# Altium PCB WX0.012.610PCB-4.2.PcbDoc (part 1 of 2)
Units mm, origin at the board's own origin, x right, y up, seen from the top; angles counter-clockwise.
Board outline 119 x 43 mm, 2 copper layers (Top Layer, Bottom Layer), stack 0.325 mm thick; 149 components, 114 nets, 503 pads, 393 vias.
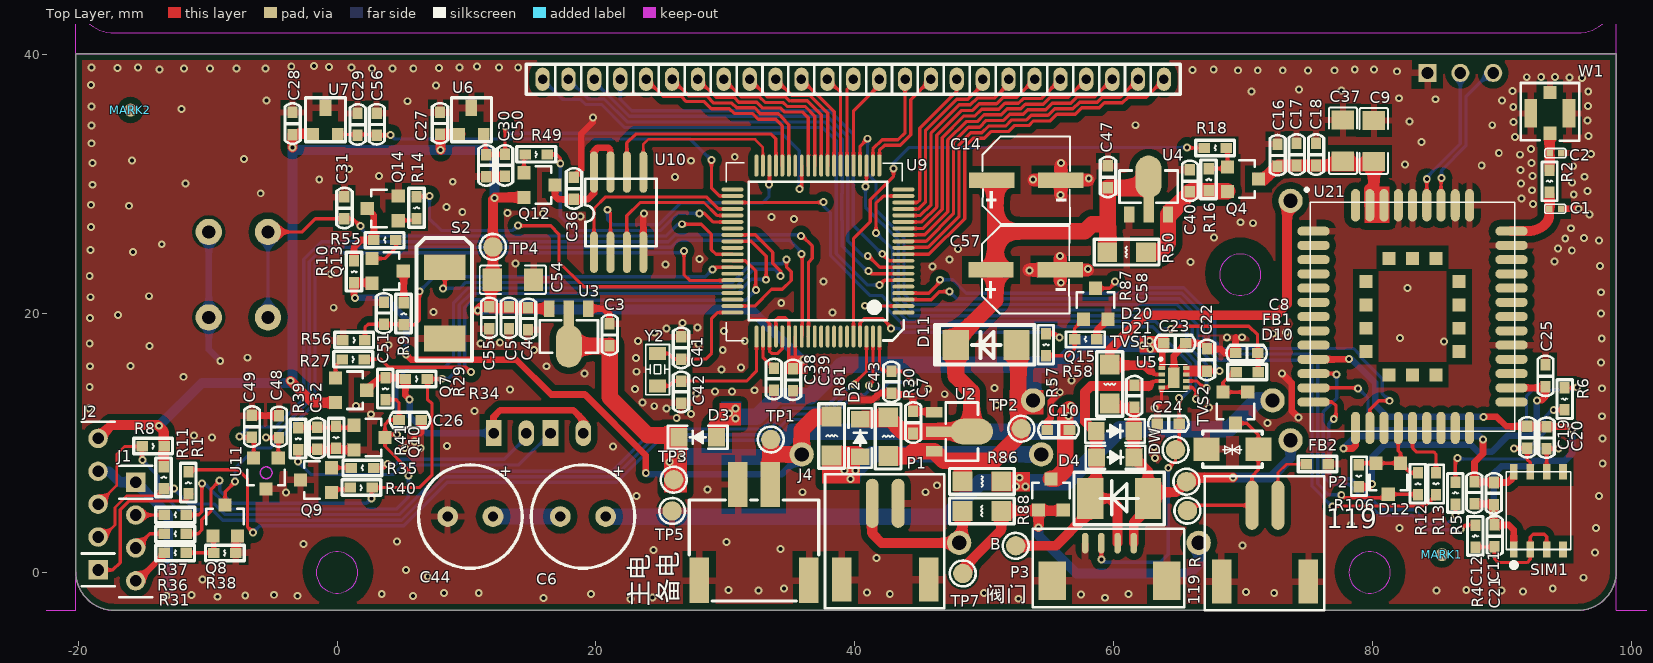
[diagram p0: Top Layer view]
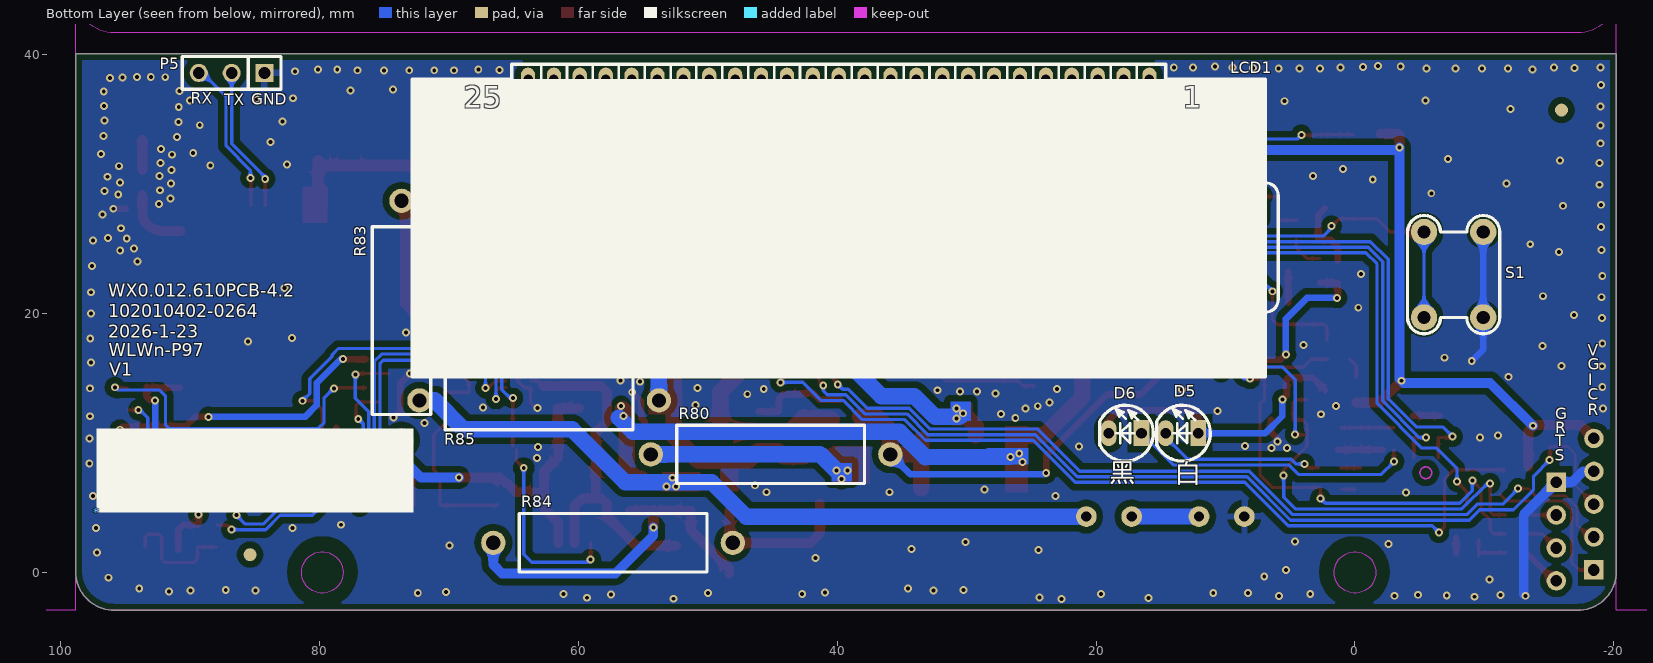
[diagram p1: Bottom Layer view, seen from below]

## Layer stack, top to bottom
Top Solder: solder mask 0.0102, Solder Resist, Dk 3.5
Top Layer: signal copper 0.0356
Dielectric 1: core 0.254, FR-4, Dk 4.2
Bottom Layer: signal copper 0.0356
Bottom Solder: solder mask 0.0102, Solder Resist, Dk 3.5

## Board outline
-20.185,0.069 ccw(c-17.185,0.069) -17.185,-2.931 95.815,-2.931 ccw(c95.815,0.069) 98.815,0.069 98.815,40.069 -20.185,40.069

## Design rules (kind name [scope] priority, off if disabled: settings)
Clearance SWS_Limit [IsComponentPad AND (AsMM(HoleSize) > 0)  AND NOT HasFootprint ('PIN254*') AND NOT HasFootprint ('金属膜电阻') AND NOT HasFootprint ('SIP-3') vs IsPAD AND (HasFootprint('*0402*') OR HasFootprint('*0603*') OR HasFootprint('*0805*') OR HasFootprint('SOT-23*')OR HasFootprint('SOT-323*'))] p1: gap=0.178 ignorepadtopadclearanceinfootprint=FALSE except(0: Arc-Hole Track-Hole SMDPad-Hole THPad-Hole Via-Hole Fill-Hole Poly-Hole Region-Hole Text-Hole; 4.5: SMDPad-THPad)
Clearance GKO_Limit_Track [IsTrack AND OnLayer('Keep-out Layer') vs IsPad AND (OnLayer('Top Layer') OR OnLayer('BOttom Layer'))AND not HasFootprint('TEST-PAD')AND not HasFootprint('DB809')AND not HasFootprint('Bridge_Pad')AND (Net<>'GND')] p2: gap=0.178 ignorepadtopadclearanceinfootprint=FALSE except(0: Arc-Hole Track-Hole SMDPad-Hole THPad-Hole Via-Hole Fill-Hole Poly-Hole Region-Hole Text-Hole; 4: Track-SMDPad)
Clearance GKO_Limit_PTH [IsPad AND  AsMM(HoleSize)>=3 vs IsPad AND (OnLayer('Top Layer') OR OnLayer('BOttom Layer'))] p3: gap=0.178 ignorepadtopadclearanceinfootprint=FALSE except(0: Arc-Hole Track-Hole SMDPad-Hole THPad-Hole Via-Hole Fill-Hole Poly-Hole Region-Hole Text-Hole; 4: SMDPad-THPad)
Clearance GKO_Limit_NPTH [IsArc AND OnLayer('Keep-out Layer') and (AsMM(ArcRadius) >=  1)   and (ArcStopAngle-ArcStartAngle= 360) vs IsPad AND (OnLayer('Top Layer') OR OnLayer('BOttom Layer'))AND not HasFootprint('TEST-PAD')AND not HasFootprint('Bridge_Pad')] p4: gap=0.178 ignorepadtopadclearanceinfootprint=FALSE except(0: Arc-Hole Track-Hole SMDPad-Hole THPad-Hole Via-Hole Fill-Hole Poly-Hole Region-Hole Text-Hole; 4: Arc-SMDPad)
Clearance ANT [InNetClass('ANT') vs InNet('GND')] p5: gap=0.508 ignorepadtopadclearanceinfootprint=FALSE except(0: Arc-Hole Track-Hole SMDPad-Hole THPad-Hole Via-Hole Fill-Hole Poly-Hole Region-Hole Text-Hole; 0.381: Arc-SMDPad Track-SMDPad SMDPad-SMDPad SMDPad-THPad SMDPad-Fill SMDPad-Poly SMDPad-Region SMDPad-Text; 0.559: Arc-Via Track-Via SMDPad-Via THPad-Via THPad-Fill THPad-Poly THPad-Region THPad-Text)
Clearance VIA-PAD-SAME [IsVia vs IsPad] p6: gap=0.381 ignorepadtopadclearanceinfootprint=FALSE except(0: Arc-Hole Track-Hole SMDPad-Via SMDPad-Hole THPad-Via THPad-Hole Via-Via Via-Hole Fill-Hole Poly-Hole Region-Hole Text-Hole)
Clearance VIA-VIA [ISVIA vs ISVIA] p7: gap=0.508 ignorepadtopadclearanceinfootprint=FALSE except(0: Arc-Hole Track-Hole SMDPad-Hole THPad-Hole Via-Hole Fill-Hole Poly-Hole Region-Hole Text-Hole)
Clearance VIA-PAD [ISVIA vs ISPAD] p8: gap=0.381 ignorepadtopadclearanceinfootprint=FALSE except(0: Arc-Hole Track-Hole SMDPad-Hole THPad-Hole Via-Hole Fill-Hole Poly-Hole Region-Hole Text-Hole)
Clearance VIA-TRACK [ISVIA vs ISTRACK] p9: gap=0.381 ignorepadtopadclearanceinfootprint=FALSE except(0: Arc-Hole Track-Hole SMDPad-Hole THPad-Hole Via-Hole Fill-Hole Poly-Hole Region-Hole Text-Hole)
Clearance Polygon [InPolygon] p10: gap=0.508 ignorepadtopadclearanceinfootprint=FALSE except(0: Arc-Hole Track-Hole SMDPad-Hole THPad-Hole Via-Hole Fill-Hole Poly-Hole Region-Hole Text-Hole)
Clearance [All] p11: gap=0.178 ignorepadtopadclearanceinfootprint=FALSE except(0: Arc-Hole Track-Hole SMDPad-Hole THPad-Hole Via-Hole Fill-Hole Poly-Hole Region-Hole Text-Hole)
ComponentClearance [All] p1 off: gap=0.254 collisioncheckmode=3 verticalgap=0.254 showdistances=FALSE
FabricationTestPointUsage TestPointUsage [All] p1: valid=0 allowmultiple=FALSE
FabricationTestpoint Testpoint [(IsPad And (OnTopLayer Or OnBottomLayer))] p1: side=3 testpointundercomponent=TRUE minsize=1.016 maxsize=2.54 preferedsize=1.524 minholesize=0 maxholesize=1.016 preferedholesize=0.813 testpointgrid=0.025 allowsidetop=TRUE allowsidebottom=TRUE usegrid=TRUE gridtolerance=0
HoleSize [All] p1 off: absolutevalues=TRUE maxlimit=7.62 minlimit=0 maxpercent=80.000 minpercent=20.000
HoleToHoleClearance [All] p1 off: gap=0.254 allowstackedmicrovias=TRUE
LayerPairs [All] p1 off: enforce=TRUE
MinimumSolderMaskSliver [All] p1 off: minsoldermaskwidth=0.254
NetAntennae [All] p1 off: netantennaetolerance=0
PlaneConnect IRM [HasFootprint ('IRM-3638J7') AND (NET = 'GND')] p1: planeconnectstyle=NoConnect reliefexpansion=0.508 reliefentries=4 reliefconductorwidth=0.254 reliefairgap=0.254
PlaneConnect "DIP_Wire-To-Board Connector" [(HasFootprint ('PH2.0-2P') or HasFootprint ('1.5-4AW')  or HasFootprint ('PH200_1*')) AND (NET = 'GND')] p2: planeconnectstyle=NoConnect reliefexpansion=0.508 reliefentries=4 reliefconductorwidth=0.254 reliefairgap=0.254
PlaneConnect DIP_KEY1 [HasFootprint ('SWT_4_600_600')] p3: planeconnectstyle=NoConnect reliefexpansion=0.508 reliefentries=4 reliefconductorwidth=0.254 reliefairgap=0.254
PlaneConnect DIP_ELECT_CAP [(HasFootprint('CAPPC_350_800_1200') OR HasFootprint('CAPPC_350_800_1600R')) and (net ='GND')] p4: planeconnectstyle=NoConnect reliefexpansion=0.508 reliefentries=4 reliefconductorwidth=0.254 reliefairgap=0.254
PlaneConnect "VIA_Direct Connect" [IsVia] p5: planeconnectstyle=Direct reliefexpansion=0.508 reliefentries=4 reliefconductorwidth=0.254 reliefairgap=0.254
PlaneConnect PIN_HEADER1 [HasFootprint ('*PIN254*')    AND (NET ='GND')] p6: planeconnectstyle=NoConnect reliefexpansion=0.508 reliefentries=4 reliefconductorwidth=0.254 reliefairgap=0.254
PlaneConnect [All] p7: planeconnectstyle=Relief reliefexpansion=0.508 reliefentries=4 reliefconductorwidth=0.508 reliefairgap=0.254
PolygonConnect DIP_KEY [HasFootprint ('SWT_4_600_600') vs InNet('GND')] p1: connectstyle=NoConnect reliefconductorwidth=0.254 reliefentries=4 polygonreliefangle="90 Angle" airgapwidth=0.254
PolygonConnect PIN_HEADER [All vs HasFootprint ('PIN254*')] p2: connectstyle=NoConnect reliefconductorwidth=0.254 reliefentries=4 polygonreliefangle="90 Angle" airgapwidth=0.508
PolygonConnect COVER_OPEN_SWITCH [HasFootprint('KEY')  Or  HasFootprint('KFT DIP-5.8X5.8') vs InNet('GND')] p3: connectstyle=NoConnect reliefconductorwidth=0.254 reliefentries=4 polygonreliefangle="90 Angle" airgapwidth=0.508
PolygonConnect SMD_ELECT_CAP [HasFootprint('CAPSM_178_660_780')  Or  HasFootprint('CAPSM_400_1000_1050') Or  HasFootprint('SMD_C 10*10.2') vs Net Like ('*GND*')] p4: connectstyle=Relief reliefconductorwidth=1.016 reliefentries=4 polygonreliefangle="90 Angle" airgapwidth=0.508
PolygonConnect [isvia] p5: connectstyle=Direct reliefconductorwidth=0.381 reliefentries=4 polygonreliefangle="90 Angle" airgapwidth=0.254
PolygonConnect PolygonConnect_1 [All] p6: connectstyle=Relief reliefconductorwidth=0.508 reliefentries=4 polygonreliefangle="90 Angle" airgapwidth=0.508
RoutingVias [All] p1: holewidth=0.254 width=0.508 viastyle="Through Hole" minholewidth=0.127 minwidth=0.127 maxholewidth=1.27 maxwidth=2.54
SilkToBoardRegionClearance [All] p1 off:
SilkToSilkClearance [All] p1 off: silktosilkclearance=0.254
SilkToSolderMaskClearance [IsPad] p1 off: minsilkscreentomaskgap=0.254 clearancetoexposedcopper=TRUE
SolderMaskExpansion [All] p1: expansion=0.102
Width [All] p1: maxlimit=7.62 minlimit=0.203 preferedwidth=0.203
18 further rules are at their usual default settings.

## Classes and differential pairs
component class WX0.008.959DL: C1 C2 C3 C4 C5 C6 C7 C9 C10 C11 C12 C14 C16 C17 C18 C19 C20 C21 C25 C37 C40 C44 C47 C51 C54 C55 C57 D2 D3 D4 D11 D12 J4 P1 P5 Q4 Q13 Q14 Q15 R2 R4 R5 R6 R9 R10 R12 R13 R14 R16 R18 R30 R50 R55 R56 R57 R58 R80 R81 R84 R85 R86 R88 R106 SIM1 TP1 TP2 TP3 TP4 TP5 TP7 U2 U3 U4 U21 W1
component class WX0.008.958DL: 119 * B C8 C22 C23 C24 C26 C27 C28 C29 C30 C31 C32 C36 C38 C39 C41 C42 C43 C48 C49 C50 C56 C58 D5 D6 D10 D20 D21 DW FB1 FB2 J1 J2 LCD1 MARK1 MARK2 P2 P3 Q7 Q8 Q9 Q10 Q12 R R1 R8 R11 R27 R29 R31 R34 R35 R36 R37 R38 R39 R40 R41 R49 R83 R87 S1 S2 TP25 TVS1 TVS2 U5 U6 U7 U9 U10 U11 Y2

## Components (designator, comment, footprint, x,y, rotation, side; value= is the part's Value field where it differs from the comment)
119 "TEST-PAD" TEST-PAD 65.684,4.775 r90 top
* "Bar Code1" "Bar Code1" 97.206,4.623 r180 bottom
B "TEST-PAD" TEST-PAD 52.426,2.057 r90 top
C1 "NC" CAP0402 94.088,28.092 r180 top
C2 "NC" CAP0402 94.113,32.385 r180 top
C3 "10uF/10V" CAP0603 21.057,17.526 r90 top
C4 "10uF/10V" CAP0603 14.757,20.422 r270 top
C5 "100nF/50V" CAP0603 13.284,20.498 r270 top
C6 "1F/2.75V" CAPPC_350_800_1600 19,4.319 r180 top locked
C7 "100nF/50V" CAP0603 44.501,10.744 r90 top
C8 "100nF/50V" CAP0603 71.095,16.942 r180 top
C9 "100uF/6.3V" GRM1206 80.086,33.325 r0 top
C10 "100nF/50V" CAP0603 56.566,10.998 r180 top
C11 "100nF/50V" CAP0603 89.357,6.934 r270 top
C12 "33pF/50V" CAP0603 87.859,6.985 r270 top
C14 "470UF" CAP-SMD_BD6.3-L6.6-W6.6-LS7.3-FD-H7.7 50.571,30.302 r0 top
C16 "100nF/50V" CAP0603 72.644,31.394 r90 top
C17 "33pF/50V" CAP0603 74.117,31.445 r90 top
C18 "10pF/50V" CAP0603 75.616,31.445 r90 top
C19 "33pF/50V" CAP0603 91.939,9.601 r90 top
C20 "33pF/50V" CAP0603 93.412,9.576 r90 top
C21 "33pF/50V" CAP0603 89.408,1.981 r90 top
C22 "100nF/50V" CAP0603 67.208,17.247 r270 top
C23 "100nF/50V" CAP0603 65.557,17.704 r180 top
C24 "100nF/50V" CAP0603 65.049,11.481 r180 top
C25 "1uF/16V" CAP0603 93.336,14.351 r90 top
C26 "100pF/50V" CAP0603 4.801,11.786 r0 top
C27 "1uF/16V" CAP0603 7.95,33.858 r90 top
C28 "1uF/16V" CAP0603 -3.44,33.839 r90 top
C29 "1nF/50V" CAP0603 1.588,33.768 r90 top
C30 "1nF/50V" CAP0603 11.532,32.268 r270 top
C31 "100nF/50V" CAP0603 0.559,27.318 r90 top
C32 "10pF/50V" CAP0603 -1.524,11.201 r270 top
C36 "100nF/50V" CAP0603 18.288,28.829 r90 top
C37 "100uF/16V" GRM1206 77.699,33.35 r0 top
C38 "100nF/50V" CAP0603 33.744,15.773 r270 top
C39 "100nF/50V" CAP0603 35.218,14.046 r90 top
C40 "100nF/50V" CAP0603 65.862,29.413 r90 top
C41 "12pF/50V" CAP0603 26.588,18.174 r270 top
C42 "12pF/50V" CAP0603 26.588,14.774 r270 top
C43 "33pF/50V" CAP0603 42.824,15.545 r270 top
C44 "1F/2.75V" CAPPC_350_800_1600 10.3,4.319 r180 top locked
C47 "100nF/50V" CAP0603 59.538,29.718 r90 top
C48 "1uF/16V" CAP0603 -4.491,10.42 r90 top
C49 "1nF/50V" CAP0603 -6.579,10.439 r90 top
C50 "33pF/50V" CAP0603 12.982,32.274 r270 top
C51 "10pF/50V" CAP0603 3.632,20.853 r270 top
C54 "100uF/16V" GRM1206 13.589,22.606 r270 top
C55 "22pF/50V" CAP0603 11.76,20.498 r270 top
C56 "33pF/50V" CAP0603 3.065,33.781 r90 top
C57 "JVJ16V470M6X8" CAP-SMD_BD6.3-L6.6-W6.6-LS7.3-FD-H7.7 50.521,23.368 r0 top
C58 "100nF/50V" CAP0603 61.595,14.453 r270 top
D2 "DS36W" SOD-123FL 40.411,8.865 r90 top
D3 "DS12W" SOD-123FL 29.388,10.439 r180 top
D4 "BAT54CLT1" SOT-23#1 55.143,6.02 r0 top
D5 "AT203" IR_254_532_300 13.36,10.759 r270 bottom
D6 "AT403" IR_254_532_300 17.76,10.759 r270 bottom
D10 "BAT54CLT1" SOT-23#1 69.393,12.725 r180 top
D11 "SS12" DO-214AC 50.14,17.577 r180 top
D12 "BAT54CLT1" SOT-23#1 81.204,7.239 r180 top
D20 "TC1N4728A" SOD-123FL 58.572,10.922 r0 top
D21 "TC1N4728A" SOD-123FL 58.598,8.89 r0 top
DW "TEST-PAD" TEST-PAD 64.77,9.474 r0 top
FB1 "FB03SN3000_30R" IND0603 71.145,15.469 r180 top
FB2 "FB03SN3000_30R" IND0603 76.581,8.357 r180 top
J1 "PIN254_1*4*WXHJ" PIN254_1*4*WXHJ -15.549,6.973 r270 top
J2 "PIN254_1*5*WXHJ" PIN254_1*5*WXHJ -18.455,0.194 r90 top
J4 "WAFER-254W-2A" "XH 2.54" 32.233,1.829 r0 top
LCD1 "GVH21861A-HPP" LCD_GVH21861A-HPP 15.877,38.094 r180 bottom locked
MARK1 "MARK" MARK 85.344,1.372 r90 top
MARK2 "MARK" MARK -15.951,35.712 r90 top
P1 "" SMT2-2.0 42.342,2.388 r0 top
P2 "PH200_1*2R" SMT2-2.0 71.679,2.235 r0 top
P3 "Header 4" SMT-1.25-4 59.665,2.261 r0 top
P5 "CON3" SIP-3 84.226,38.583 r0 bottom
Q4 "UT3401ZG" SOT-23#1 69.977,30.378 r270 top
Q7 "PNPS-9012" SOT-23#1 1.092,14.072 r270 top
Q8 "NPNS-9013" SOT-23#1 -8.641,4.017 r0 top
Q9 "PNPS-9012" SOT-23#1 -1.626,7.137 r90 top
Q10 "NPNS-9013" SOT-23#1 2.515,10.414 r270 top
Q12 "PNPS-9012" SOT-23#1 15.646,29.921 r270 top
Q13 "PNPS-9012" SOT-23#1 3.912,23.292 r270 top
Q14 "NPNS-9013" SOT-23#1 3.531,28.118 r90 top
Q15 "NPNS-9013" SOT-23#1 58.598,20.752 r0 top
R "TEST-PAD" TEST-PAD 65.608,7.01 r90 top
R1 "100R 5%" RES0603 -11.481,7.772 r270 top
R2 "0R 5%" RES0603 93.656,29.362 r90 top
R4 "22R 5%" RES0603 87.935,3.658 r270 top
R5 "22R 5%" RES0603 86.385,6.985 r270 top
R6 "22R 5%" RES0603 94.818,12.548 r90 top
R8 "10K 5%" RES0603 -13.36,9.754 r180 top
R9 "330K 5%" RES0603 5.156,20.828 r270 top
R10 "10K 5%" RES0603 1.321,24.079 r270 top
R11 "10K 5%" RES0603 -13.386,8.179 r270 top
R12 "1K 5%" RES0603 83.49,7.696 r270 top
R13 "1K 5%" RES0603 84.887,5.994 r90 top
R14 "3K 5%" RES0603 6.147,29.007 r270 top
R16 "2M 5%" RES0603 67.335,31.191 r270 top
R18 "200K 5%" RES0603 66.98,32.791 r0 top
R27 "3K 5%" RES0603 2.095,16.459 r180 top
R29 "20K 5%" RES0603 3.734,15.037 r270 top
R30 "0R 5%" RES1206 42.57,11.989 r270 top
R31 "3K 5%" RES0603 -13.35,1.518 r0 top
R34 "20K 5%" RES0603 6.985,14.935 r180 top
R35 "100R 5%" RES0603 1.118,8.077 r0 top
R36 "1K 5%" RES0603 -13.333,2.986 r0 top
R37 "1K 5%" RES0603 -13.333,4.45 r0 top
R38 "1K 5%" RES0603 -7.816,1.498 r180 top
R39 "20K 5%" RES0603 -2.997,11.176 r270 top
R40 "3K 5%" RES0603 2.718,6.553 r180 top
R41 "47K 5%" RES0603 -0.076,9.576 r90 top
R49 "3K 5%" RES0603 16.231,32.283 r180 top
R50 "0R 5%" RES1206 59.487,24.74 r0 top
R55 "10K 5%" RES0603 2.845,25.679 r0 top
R56 "220K 5%" RES0603 2.159,17.932 r180 top
R57 "3K 5%" RES0603 54.762,18.44 r270 top
R58 "20K 5%" RES0603 56.972,18.009 r0 top
R80 "33R 5%" 金属膜电阻 35.89,9.119 r0 bottom locked
R81 "0R 5%" RES1206 38.202,12.04 r270 top
R83 "20R 2W" 金属膜电阻 73.651,28.702 r270 bottom locked
R84 "33R 5%" 金属膜电阻 48.057,2.286 r0 bottom
R85 "10R 2W" 金属膜电阻 72.263,13.284 r180 bottom
R86 "0R 5%" RES1206 51.308,7.036 r180 top
R87 "0R 5%" RES1206 59.69,13.056 r90 top
R88 "0R 5%" RES1206 48.311,4.75 r0 top
R106 "20K 5%" RES0603 78.918,6.604 r90 top
S1 "SWT_4_600_600_430" SWT_4_600_600 -7.62,23 r270 bottom locked
S2 "SWS_2_520_300_300" SWS_2_520_300 8.331,23.571 r90 top
SIM1 "SIMIC" SIMIC 95.301,7.772 r180 top
TP1 "TEST-PAD" TEST-PAD 33.503,10.268 r0 top
TP2 "TEST-PAD" TEST-PAD 52.857,11.1 r0 top
TP3 "TEST-PAD" TEST-PAD 26.01,7.163 r0 top
TP4 "TEST-PAD" TEST-PAD 12.04,25.146 r0 top
TP5 "TEST-PAD" TEST-PAD 25.883,4.75 r180 top
TP7 "TEST-PAD" TEST-PAD 48.336,-0.076 r0 top
TVS1 "SMBJ6.0CA" DO-214AA 62.763,5.715 r180 top
TVS2 "SMAJ5.0CA" SMAJ5.0CA 69.164,9.525 r0 top
U2 "CE6232A50P" SOT-89 47.015,10.871 r270 top
U3 "CE6232A33P" SOT-89 17.907,19.482 r180 top
U4 "CE6232A36P" SOT-89 62.687,28.55 r0 top
U5 "DRV8837DSGR" S-PWSON-N8 64.643,15.037 r0 top
U6 "S-5712ACDL1" SOT-23#2 10.372,34.749 r0 top
U7 "S-5712ACDL1" SOT-23#2 -0.902,34.749 r0 top
U9 "FM33LG0x8" LQFP80 37.148,24.824 r180 top locked
U10 "P25Q80H-SUH-IR" SOP-8L-200MIL 19.851,23.927 r90 top
U11 "S-5712ACDL1" SOT-23#1 -5.489,7.647 r180 top
U21 "BC28-CNS" BC28-CNS 83.074,19.761 r0 top
W1 "ANT-IPEX" ANT-IPEX 93.682,35.433 r0 top
Y2 "32.768kD" SMD-3215_2P 24.764,14.415 r90 top

## Footprints (in the part's own frame and the unit in brackets; to place one, negate y for a bottom-side part, rotate by r counter-clockwise, add the part's x,y. Pads: shape width x height; smd on the part's side, far side on the other; paste and mask are expansions set on the pad)
ANT-IPEX [mm] "IPX天线座"
  rect 1x1.05 smd: 1(0,-1.525)
  rect 1x2.2 smd: 2(-1.475,0.025) 2(1.475,0.025)
  rect 1x1 smd: 2(0,1.626)
  silkscreen extent -2.26,-2.08 2.26,2.37, body extent -1.5,-1.55 1.5,1.55, height 1.25
"Bar Code1" [mm]
  silkscreen extent 0,0 24.5,6.5
BC28-CNS [mm] "BC28-CNS Moudle 58Pin 15.8X17.7mm H2.2mm RO"
  oval 2.5x0.7 smd mask+0.05: 1(-7.65,6.6) 2(-7.65,5.5) 3(-7.65,4.4) 4(-7.65,3.3) 5(-7.65,2.2) 6(-7.65,1.1) 7(-7.65,0) 8(-7.65,-1.1) 9(-7.65,-2.2) 10(-7.65,-3.3) 11(-7.65,-4.4) 12(-7.65,-5.5) 13(-7.65,-6.6) 23(7.65,-6.6) 24(7.65,-5.5) 25(7.65,-4.4) 26(7.65,-3.3) 27(7.65,-2.2) 28(7.65,-1.1) 29(7.65,0) 30(7.65,1.1) 31(7.65,2.2) 32(7.65,3.3) 33(7.65,4.4) 34(7.65,5.5) 35(7.65,6.6)
  oval 0.7x2.5 smd mask+0.05: 14(-4.4,-8.6) 15(-3.3,-8.6) 16(-2.2,-8.6) 17(-1.1,-8.6) 18(0,-8.6) 19(1.1,-8.6) 20(2.2,-8.6) 21(3.3,-8.6) 22(4.4,-8.6) 36(4.4,8.6) 37(3.3,8.6) 38(2.2,8.6) 39(1.1,8.6) 40(0,8.6) 41(-1.1,8.6) 42(-2.2,8.6) 43(-3.3,8.6) 44(-4.4,8.6)
  rect 1x1 smd mask+0.05: 45(-3.6,2.7) 46(-3.6,0.9) 47(-3.6,-0.9) 48(-3.6,-2.7) 49(-1.8,-4.5) 50(0,-4.5) 51(1.8,-4.5) 52(3.6,-2.7) 53(3.6,-0.9) 54(3.6,0.9) 55(3.6,2.7) 56(1.8,4.5) 57(0,4.5) 58(-1.8,4.5)
  silkscreen extent -7.9,-8.85 7.9,8.85, body extent -7.9,-8.85 7.9,8.85, height 2
CAP0402 [mm]
  rect 0.5x0.5 smd: 1(-0.457,0) 2(0.457,0)
  silkscreen extent -0.81,-0.36 0.81,0.36, body extent -0.5,-0.25 0.5,0.25, height 0.5
CAP0603 [mil]
  rect 35x31 smd: 1(-0.49,0) 2(66.51,0)
  silkscreen extent -29,-24 94,23, body extent 1,-15 72,15, height 20
CAP-SMD_BD6.3-L6.6-W6.6-LS7.3-FD-H7.7 [mm]
  rect 3.5x1.2 smd paste+0.051: 1(0,0) 2(5.34,0)
  silkscreen extent -0.71,-3.38 6.05,3.38, body extent -0.86,-3.3 6.44,3.3, height 7.7
CAPPC_350_800_1600 [mm]
  round 1.6 hole 0.8: 1(-1.75,0) 2(1.75,0)
  silkscreen extent -4,-4 4,4, body extent -4.01,-4 3.97,4, height 15.11
DO-214AA [mil]
  rect 80x125 smd: 1(5,0) 2(180,0)
  silkscreen extent -45,-80 230,80, body extent -13,-77 203,77, height 96
DO-214AC [mil]
  rect 80x90.55 smd: 1(-92.5,0) 2(92.5,0)
  silkscreen extent -146,-60 156,60, body extent -91,-53 90,53, height 94
GRM1206 [mm]
  rect 1.728x1.485 smd: 1(0,-1.593) 2(0,1.593)
  silkscreen extent -1.09,-2.56 1.09,2.56, body extent -0.8,-1.64 0.8,1.64, height 1.6
IND0603 [mil]
  rect 35x31 smd: 1(0,0) 2(67,0)
  silkscreen extent -26,-24 92,23, body extent 0,-15 71,15, height 12
IR_254_532_300 [mm]
  rect 2x1.2 hole 0.813: 1(0,1.27)
  oval 2x1.2 hole 0.813: 2(0,-1.27)
  silkscreen extent -2.16,-1.96 2.16,2.18, body extent -1.65,-1.64 1.64,1.66, height 5.51
LCD_GVH21861A-HPP [mm]
  oval 1.1x1.8 hole 0.732: 1(0,0) 2(-2,0) 3(-4,0) 4(-6,0) 5(-8,0) 6(-10,0) 7(-12,0) 8(-14,0) 9(-16,0) 10(-18,0) 11(-20,0) 12(-22,0) 13(-24,0) 14(-26,0) 15(-28,0) 16(-30,0) 17(-32,0) 18(-34,0) 19(-36,0) 20(-38,0) 21(-40,0) 22(-42,0) 23(-44,0) 24(-46,0) 25(-48,0)
  silkscreen extent -56.95,-23 9.95,1.17, body extent -57.15,-23.24 9.14,0, height 5.2
LQFP80 [mm]
  oval 1.7x0.3 smd: 1(-6.6,4.75) 2(-6.6,4.25) 3(-6.6,3.75) 4(-6.6,3.25) 5(-6.6,2.75) 6(-6.6,2.25) 7(-6.6,1.75) 8(-6.6,1.25) 9(-6.6,0.75) 10(-6.6,0.25) 11(-6.6,-0.25) 12(-6.6,-0.75) 13(-6.6,-1.25) 14(-6.6,-1.75) 15(-6.6,-2.25) 16(-6.6,-2.75) 17(-6.6,-3.25) 18(-6.6,-3.75) 19(-6.6,-4.25) 20(-6.6,-4.75) 41(6.6,-4.75) 42(6.6,-4.25) 43(6.6,-3.75) 44(6.6,-3.25) 45(6.6,-2.75) 46(6.6,-2.25) 47(6.6,-1.75) 48(6.6,-1.25) 49(6.6,-0.75) 50(6.6,-0.25) 51(6.6,0.25) 52(6.6,0.75) 53(6.6,1.25) 54(6.6,1.75) 55(6.6,2.25) 56(6.6,2.75) 57(6.6,3.25) 58(6.6,3.75) 59(6.6,4.25) 60(6.6,4.75)
  oval 0.3x1.7 smd: 21(-4.75,-6.6) 22(-4.25,-6.6) 23(-3.75,-6.6) 24(-3.25,-6.6) 25(-2.75,-6.6) 26(-2.25,-6.6) 27(-1.75,-6.6) 28(-1.25,-6.6) 29(-0.75,-6.6) 30(-0.25,-6.6) 31(0.25,-6.6) 32(0.75,-6.6) 33(1.25,-6.6) 34(1.75,-6.6) 35(2.25,-6.6) 36(2.75,-6.6) 37(3.25,-6.6) 38(3.75,-6.6) 39(4.25,-6.6) 40(4.75,-6.6) 61(4.75,6.6) 62(4.25,6.6) 63(3.75,6.6) 64(3.25,6.6) 65(2.75,6.6) 66(2.25,6.6) 67(1.75,6.6) 68(1.25,6.6) 69(0.75,6.6) 70(0.25,6.6) 71(-0.25,6.6) 72(-0.75,6.6) 73(-1.25,6.6) 74(-1.75,6.6) 75(-2.25,6.6) 76(-2.75,6.6) 77(-3.25,6.6) 78(-3.75,6.6) 79(-4.25,6.6) 80(-4.75,6.6)
  silkscreen extent -6.62,-6.81 7.1,6.91, body extent -7,-7.03 7,6.98, height 1.45
MARK [mm]
  round 1 smd: 0(0,0)
  round 1 smd far side: 1(0,0)
PIN254_1*4*WXHJ [mm] "Connector; Header; 4 Position"
  rect 1.5x1.5 hole 0.9: 1(0,0)
  round 1.5 hole 0.9: 2(2.54,0) 3(5.08,0) 4(7.62,0)
  silkscreen extent -1.27,-1.27 8.89,1.27
PIN254_1*5*WXHJ [mm]
  rect 1.5x1.5 hole 0.9: 1(0,0)
  round 1.5 hole 0.9: 2(2.54,0) 3(5.08,0) 4(7.62,0) 5(10.16,0)
  silkscreen extent -1.27,-1.27 11.43,1.27
RES0603 [mil]
  rect 35x31 smd: 1(0,0) 2(67,0)
  silkscreen extent -26,-24 92,23, body extent 0,-15 71,15, height 12
RES1206 [mil]
  rect 60x60 smd: 1(0,0) 2(118.11,0)
  silkscreen extent -39,-39 157,39, body extent -28,-29 150,29, height 20
S-PWSON-N8 [mm]
  rect 0.5x0.28 smd: 1(-0.95,0.75) 2(-0.95,0.25) 3(-0.95,-0.25) 4(-0.95,-0.75) 5(0.95,-0.75) 6(0.95,-0.25) 7(0.95,0.25) 8(0.95,0.75)
  rect 0.9x1.6 smd: 9(0,0)
  silkscreen extent -1.09,-1.05 1.04,1.52, body extent -0.98,-1 1.02,1, height 0.77
SIMIC [mm]
  rect 0.6x1.2 smd: 1(4.405,6) 2(3.135,6) 3(1.865,6) 4(0.595,6) 5(0.595,0) 6(1.865,0) 7(3.135,0) 8(4.405,0)
  silkscreen extent 0,0 5,7.28, body extent 0,0 4.95,5.97, height 0.6
SIP-3 [mil]
  rect 55x55 hole 36: 1(0,0)
  round 55 hole 36: 2(100,0) 3(200,0)
  silkscreen extent -50,-50 250,50
SMAJ5.0CA [mm]
  rect 2x1.8 smd: 1(-2,0) 2(2,0)
  silkscreen extent -2.3,-1.4 2.3,1.4
SMD-3215_2P [mm]
  rect 1x1.3 smd: 1(0,0) 2(2.5,0)
  silkscreen extent -0.69,-0.91 3.19,0.91, body extent -0.3,-0.99 2.9,0.99, height 0.7
SMT2-2.0 [mm]
  oval 1x3.8 smd: 1(1,2.95) 2(-1,2.95)
  rect 1.5x3.4 smd: 3(-3.35,-2.95) 4(3.35,-2.95)
  silkscreen extent -4.67,-5.15 4.57,5.2, body extent -3.94,-4.33 4.01,4.32, height 5.6
SMT-1.25-4 [mm]
  oval 0.5x1.6 smd: 1(-1.875,0) 2(-0.625,0) 3(0.625,0) 4(1.875,0)
  rect 2.1x3 smd: 5(-4.425,-2.9) 6(4.425,-2.9)
  silkscreen extent -5.92,-4.95 5.77,1.1
SOD-123FL [mm]
  rect 1.3x1.4 smd: 1(0.074,0) 2(2.974,0)
  silkscreen extent -0.78,-0.9 3.82,0.9, body extent -0.28,-0.82 3.32,0.82, height 0.95
SOP-8L-200MIL [mm]
  oval 3.2x0.61 smd: 1(0.8,0) 2(0.8,-1.27) 3(0.8,-2.54) 4(0.8,-3.81) 5(7,-3.81) 6(7,-2.54) 7(7,-1.27) 8(7,0)
  silkscreen extent 1.27,-4.83 6.48,0.66, body extent 0.89,-4.35 6.89,0.55, height 1.7
SOT-23#1 [mil]
  rect 40x40 smd: 1(-37.4,-47.24) 2(37.4,-47.24) 3(0,47.24)
  silkscreen extent -57,-12 57,35, body extent -57,-55 57,55, height 47
SOT-23#2 [mil]
  rect 36x36 smd: 1(-37,-35) 2(38,-35)
  rect 36x50 smd: 3(0,45)
  silkscreen extent -60,-59 62,75, body extent -44,-35 44,45, height 39
SOT-89 [mm]
  rect 0.8x1.27 smd: 1(-1.5,-0.9) 3(1.5,-0.9)
  oval 2x3.3 smd: 2(0,2)
  rect 0.8x2.54 smd: 2(0,-0.265)
  silkscreen extent -2.25,0 2.25,2.5, body extent -2.25,-1.02 2.25,2.92, height 1.4
SWS_2_520_300 [mm]
  rect 2x3.2 smd: 1(0,0) 2(-5.5,0)
  silkscreen extent -7.2,-2.08 2.25,2.2, body extent -5.32,-1.58 -0.02,1.52, height 3.05
SWT_4_600_600 [mil]
  round 80 hole 40: 1(-130,-90) 1(130,-90) 2(-130,90) 2(130,90)
  silkscreen extent -180,-140 180,140, body extent -162,-118 162,118, height 193
TEST-PAD [mm]
  round 1.5 smd: 1(0,0)
  silkscreen extent -1,-1 1,1
"XH 2.54" [mm]
  rect 1.5x3.5 smd paste+0 mask+0.05: 1(1.227,4.968) 2(-1.273,4.968) 3(4.213,-2.441) 4(-4.253,-2.441)
  silkscreen extent -5.02,-4.04 4.98,3.76, body extent -5.05,-4.15 4.95,6.35, height 6.13
金属膜电阻 [mil]
  round 74 hole 43.31: 1(0,0) 2(728.35,0)
  silkscreen extent 79,-89 650,89

## Part data
119 B DW R TP1 TP2 TP3 TP4 TP5 TP7: library part AD_WXHJ_TEST-PAD_01, "单面焊盘测试点"
*: library part "AD_WXHJ_Bar Code_02", "条形码 ,填充，无需焊接器件"
C1 C2: library part 101020103-0005
C3 C4: library part 101020103-0026, "106pF,10 V,±10%,0603,村田,GRM188R61A106KE47D"
C5 C7 C8 C10 C11 C16 C22 C23 C24 C31 C36 C38 C39 C40 C47 C58: library part 101020103-0021, "104pF,50 V,±10%,0603,国巨,CC0603KRX7R9BB104"
C6 C44: library part 1010202-0015, "1F,2.75 V,-20%~+20%,8mm*16mm,红宝石,2.7 DMC 1 M MY4 8X16"
C9: library part 101020101-0020, "100uF,6.3 V,±20%,1206,村田,GRM31CR60J107ME39L"
C12 C17 C19 C20 C21 C43 C50 C56: library part 101020103-0027, "33pF,50 V,±10%,0603,国巨,CC0603KRNPO9BN33"
C14: library part JVJ16V470M6X8, "470UF,10v"
C18 C32 C51: library part 101020103-0014, "10pF,50 V,±5%,0603,X7R,国巨,CC0603JRNPO9BN100"
C25 C27 C28 C48: library part 101020103-0003, "105pF,16 V,±10%,0603,国巨,CC0603KRX7R7BB105"
C26: library part 101020103-0010, "101pf,50 V,±5%,0603,国巨,CC0603JRNP09BN101"
C29 C30 C49: library part 101020103-0022, "102pF,50 V,±10%,0603,国巨,CC0603KRX7R9BB102"
C37: library part 101020101-0005
C41 C42: library part 101020103-0005, "12P,50 V,±5%,0603,国巨,CC0603JRNPO9BN12"
C54: library part 101020101-0005, "100u,16 V,±10%,1206,国巨,CC1206KRNPO7BN106P"
C55: library part 101020103-0009, "22pF,50 V,±5%,0603,国巨,CC0603JRNPO9BN22"
D2: library part 101040101-0048, "DS36W,SOD123-FL,3 A,42 V,60 V,浙江领晨科技有限公司,DS36W"
D3: library part 101040101-0048, "DS12W,SOD-123FL,1 A,0.55 V,20 V,领晨科技,DS12W"
D4 D10 D12: library part 101040101-0038, "BAT54CLT1，SOT23-3,SOT23-3,0.2 A,0.8 V,30 V,安森美,BAT54CLT1"
D5: library part 101040102-0010, "DIP-2,φ3,插件,红光,上海品观电子有限公司/可得,AT203"
D6: library part 101040102-0011, "DIP-2,φ3,插件,红光,上海品观电子有限公司/可得,AT403-PD-01"
D11: library part 101040101-0009, "SS12,DO-214AC,1 A,0.55 V,20 V,昶鑫,SS12"
D20 D21: library part 101040101-0005, "4148,4148,0.2 A,1 V,100 V,先科,LL4148"
FB1 FB2: library part 109010101-0003, "chilisin(奇力新),0603,30Ω ±25% @100MHz,150 V,125 ℃,PBY160808T-300Y-N,-55 ℃,不含铅,,,圆盘,30Ω ±25% @100MHz"
J1: library part AD_WXHJ_PinHeader_01, "1*4 ，Φ1.0 ，2.54mm，直脚,无需焊接器件"
J2: library part AD_WXHJ_PinHeader_02, "1*5 ，Φ1.0 ，2.54mm，直脚,无需焊接器件"
LCD1: library part 1010801-0028, "GVH21861A-HPP/GVH20913A－HPP-WG,65*23mm,针脚,段码,21,液晶,全透,60 ℃,-20 ℃,金视界/合肥精显,GVH21861A-HPP/GVH20913A－HPP-WG"
MARK1 MARK2: library part AD_WXHJ_MARK_01, "MARK点"
P1 P2: library part 1010902-0105, "2.0-2AW,直插弯座，2PIN，脚间距2mm，带防翘起,公头,单排,2.0-2AW;直插弯座，2PIN,脚间距2mm，带防翘起"
P3: "Header, 4-Pin"
P5: "Connector"
Q4: library part 101040201-0013, "UT3401ZG,P-MOS,SOT-23,UTC,UT3401ZG"
Q7 Q9 Q12 Q13: library part 101040201-0001, "9012,PNP,SOT-23,JCET;长电,S9012"
Q8 Q10 Q14 Q15: library part 101040201-0002, "9013,NPN,SOT-23,长电,S9013"
R1 R35: library part 101010103-0022, "100R,±5%,1/10W,0603,国巨,RC0603JR-07100RL"
R2: library part 101010103-0001, "国巨,±5%,0603,,155 ℃,-55 ℃,RC0603J2-070RL,无铅,200 ppm/℃,1/10W,,0R"
R4 R5 R6 R80 R83 R84 R85: library part 101010103-0009, "国巨,±5%,0603,,155 ℃,-55 ℃,RC0603JR-0722RL,无铅,200 ppm/℃,1/10W,,22欧"
R8 R10 R11 R55: library part 101010103-0003, "国巨,±5%,0603,,155 ℃,-55 ℃,RC0603JR-0710KL,无铅,200 ppm/℃,1/10W,,10K"
R9: library part 101010103-0066, "330K,±5%,1/10W,0603,国巨,RC0603JR-07330KL"
R12 R13 R56: library part 101010103-0044, "220K,±5%,1/10W,0603,国巨,RC0603JR-07220KL"
R14 R27 R31 R40 R49 R57: library part 101010103-0006, "国巨,±5%,0603,,155 ℃,-55 ℃,RC0603JR-073KL,无铅,100 ppm/℃,1/10W,,3K"
R16: library part 101010103-0025, "国巨,±5%,0603,,155 ℃,-55 ℃,RC0603JR-072ML,含铅,100 ppm/℃,1/10W,,2M"
R18: library part 101010103-0034, "200K,±5%,1/10W,0603,国巨,RC0603JR-07200KL"
R29 R34 R39 R58 R106: library part 101010103-0004, "国巨,±5%,0603,,155 ℃,-55 ℃,RC0603JR-0720KL,无铅,200 ppm/℃,1/10W,,20K"
R30 R50 R81 R86 R87 R88: library part 101010101-0013, "0Ω,±5%,1/4W,1206,国巨,RC1206JR-070RL"
R36 R37 R38: library part 101010103-0008, "1K,±5%,1/10W,0603,国巨,RC0603JR-071KL"
R41: library part 101010103-0012, "47K,±5%,1/10W,0603,国巨,RC0603JR-0747KL"
S1: library part 1011001-0027, "TS-1102,机械轻触,6*6*4.3直插,6*6*4.3直插,乐清市羽欧电子"
S2: library part 1011001-0041, "CSX-SEN-645B,垂直45°开关转换,3*5.2mm,360°任意方位倾斜检测,深圳市成晟科技有限公司"
SIM1: library part AD_XN_SIMIC_01, "SIMIC虚拟器件"
TVS1: library part 101040101-0024, "SMBJ6.0CA,DO-214AA,10.3 V,6.0 V,600 W,58.3 A,800 uA,上海君耀电子有限公司,SMBJ6.0CA"
TVS2: library part SMAJ5.0CA_C693487
U2: library part 1010503-0013, "S-1206B50-U3,S-1206B50-U3,SOT89-3,6.5 V,1.7 V,0.2 V,5 V,250mA@VIN≧VOUT(S)＋1.0 V﹐1.5 V≦VOUT(S),1 uA,精工电子"
U3: library part 1010503-0002, "S-1206B33-U3T1G,S-1206B33-U3T1G,SOT89-3,6.5 V,1.7 V,0.15 V,3.3 V,250mA@VIN≧VOUT(S)＋1.0 V﹐1.5 V≦VOUT(S),1 uA,精工电子"
U4: library part 1010503-0031, "CE6232A36P,CE6232A36P,SOT89-3,8 V,1.8 V,0.11 V,3.6 V,600mA,0.8 uA,南京芯力微电子有限公司"
U5: library part 101050101-0060, "DRV8837DSGR,S-PWSON-N8,TI,DRV8837DSGR"
U6 U7 U11: library part 1010504-0002, "S-5712ACDL1,SOT23-3,3.5 V,1.6 V,2 uA,精工电子,S-5712ACDL1"
U10: library part 101050101-0165, "P25Q80H-SUH-IR,SOP8208mil,普冉半导体（上海）股份有限公司,P25Q80H-SUH-IR"
U21: "BC28-CNS Moudle 58Pin 15.8X17.7mm H2.2mm RO"
W1: library part 1010902-0053, "IPEX，配GPRS天线转接线"
Y2: library part 1010601-0009

## Via types
v1: diameter 0.61, hole 0.305, Top Layer to Bottom Layer, tented both sides, 393 vias

## Nets (pads, with @x,y where several pads share a name; then routed paths per layer and width w, separated by ;. In a path a pad name is that pad's centre, name@x,y a point inside that pad or via, vN(x,y) a via of type N, cw(c..) or ccw(c..) an arc to the next point about the centre after c; other vN are vias at no path point)
3.3V: C4.1 C5.1 C27.1 C28.1 C39.2 C54.1 C55.1 J2.5 Q7.2 Q12.2 R8.1 R11.1 TP4.1 U3.3 U6.1 U7.1 U9.64 U9.66 U9.67 | length 119
  Top Layer w0.254: U9.64@33.898,18.224 33.898,19.508 34.075,19.685 34.633,19.685 34.898,19.42 U9.66@34.898,18.224 34.898,16.055 C39.2@35.218,15.736 ; 35.394,16.514 U9.67@35.394,18.035 ; C39.2@35.398,15.916 U9.67@35.398,18.224
  Top Layer w0.762: J2.5@-18.455,10.354 -17.43,11.379 -13.843,11.379 -13.386,10.922 R11.1@-13.386,8.179 ; v1(-3.581,14.808) -1.895,13.122 Q7.2@-0.108,13.122 ; v1(-3.44,32.828) C28.1@-3.44,33.826 ; C28.1@-3.382,33.884 U7.1@-1.948,33.884 ; v1@8.017,32.629 C27.1@8.017,33.854 ; C27.1@8.025,33.862 U6.1@9.544,33.862 ; v1(10.872,20.244) 11.138,20.51 C55.1@11.76,20.51 ; v1@12.04,28.804 TP4.1@12.04,25.146 12.04,22.606 11.889,22.455 11.889,20.382 U3.3@16.407,20.382 ; v1@12.207,28.971 Q12.2@14.446,28.971
  Bottom Layer w0.762: v1(-13.741,11.328) -10.439,14.63 v1@-3.759,14.63 ; v1@-3.44,14.949 v1(-3.44,32.828) ; v1@-3.251,32.639 v1(8.001,32.639) 11.616,32.639 12.167,32.088 v1(12.167,28.931) ; v1(10.872,20.244) 11.113,20.244 11.189,20.32 31.988,20.32 35.874,16.434 v1(36.043,16.434)
3.6V: C3.1 C10.1 D3.2 D4.3 TP3.1 U3.2 | length 51.4
  Top Layer w1.27: U3.2@17.907,17.482 21.025,17.482 C3.1@21.057,17.514 21.057,13.538 24.003,10.592 D3.2@26.388,10.592 ; D4.3@55.143,7.22 55.531,7.22 56.261,7.95 56.261,12.281 v1@56.572,12.592
  Bottom Layer w1.27: v1(26.619,8.915) 33.158,8.915 33.183,8.89 35.164,10.871 55.778,10.871 56.871,11.963
  other v1: 25.679,8.534 25.933,9.195 56.49,12.09 56.693,12.852
5V: C23.2 D3.1 D11.1 R30.2 R85.2 R86.2 TP2.1 U2.3 U5.1 | length 57.8
  Top Layer w1.27: D3.1@29.288,10.592 29.288,11.305 v1(30.277,12.294) ; R30.2@42.57,8.989 44.168,8.989 44.55,9.371 U2.3@46.115,9.371 46.876,8.611 50.698,8.611 52.857,10.77 52.629,11.125 D11.1@52.629,17.234
  Bottom Layer w1.27: v1(30.277,12.294) 30.556,12.014 32.428,12.014 34.028,13.614 36.576,13.614 38.418,15.457 38.456,15.457 39.052,16.053 55.843,16.053 56.122,16.332 56.159,16.332 57.506,17.678 v1@62.56,17.678 ; R85.2@53.763,13.284 53.763,16.011
  other v1: 30.785,11.887 30.785,12.675 62.814,17.247 62.23,17.526 62.763,17.882
119: C8.1 FB1.1 U9.43 | length 50
  Top Layer w0.254: U9.43@30.548,28.574 30.549,28.575 37.541,28.575 v1(37.592,28.626) ; v1(64.414,18.796) 64.643,19.025 70.434,19.025 71.107,18.352 C8.1@71.107,16.942 ; FB1.1@71.145,15.469 C8.1@71.145,16.903
  Bottom Layer w0.254: v1(37.592,28.626) 37.592,28.27 38.125,27.737 38.125,24.453 41.191,21.387 42.112,21.387 42.112,21.359 42.44,21.031 42.444,21.031 44.07,19.406 63.19,19.406 63.799,18.796 v1(64.414,18.796)
ADC_CTL: R14.1 U9.56 | length 30.1
  Top Layer w0.254: R14.1@5.893,29.032 v1@7.188,29.032 ; v1@14.072,26.772 16.51,26.772 17.145,26.137 17.145,23.978 19.049,22.074 U9.56@30.548,22.074
  Bottom Layer w0.254: v1(7.138,29.083) 7.138,27.33 8.052,26.416 13.589,26.416 v1(13.97,26.797)
CAP_CHK: C49.1 U9.69 U11.2 | length 66.8
  Top Layer w0.254: v1@-7.493,10.439 v1@-7.481,10.439 ; v1@-7.481,10.427 C49.1@-6.579,10.427 ; U11.2@-6.431,8.855 C49.1@-6.431,10.427 ; v1(35.839,25.984) 35.941,25.984 36.703,25.222 36.703,24.251 36.424,23.971 36.424,18.249 U9.69@36.398,18.224
  Bottom Layer w0.254: v1(-7.544,10.49) -6.803,11.231 -4.758,11.231 -2.565,13.423 -2.565,24.183 -1.196,25.552 25.579,25.552 26.112,26.086 v1@35.738,26.086
CAP_CTL: C48.1 U9.68 U11.1 | length 63.4
  Top Layer w0.254: v1@-5.489,10.408 C48.1@-4.491,10.408 ; U11.1@-4.539,8.847 C48.1@-4.539,10.388 ; v1@35.89,24.549 v1(35.89,24.587) ; U9.68@35.898,18.224 35.929,18.255 v1@35.929,24.549
  Bottom Layer w0.254: v1(-5.499,10.418) -4.96,10.418 -2.134,13.245 -2.134,24.004 -1.017,25.121 25.832,25.121 26.365,25.654 34.976,25.654 35.89,24.74 v1(35.89,24.587)
CLOSE: U5.5 U9.19 | length 41
  Top Layer w0.254: v1(41.631,26.213) 41.631,28.499 42.206,29.074 U9.19@43.748,29.074 ; U5.5@65.593,14.287 66.053,14.287 66.345,13.995 v1(66.345,13.411)
  Bottom Layer w0.254: v1(41.631,26.213) 41.662,26.213 42.926,24.949 42.926,21.16 44.249,19.837 64.522,19.837 65.634,18.726 65.634,16.994 66.345,16.282 v1(66.345,13.411)
COM0: LCD1.1 U9.6 | length 39.7
  Top Layer w0.254: v1(41.91,22.2) 42.284,22.574 U9.6@43.748,22.574
  Bottom Layer w0.254: LCD1.1@15.877,38.094 17.446,36.525 18.835,36.525 19.216,36.144 20.444,36.144 22.222,34.366 37.513,34.366 38.583,33.296 38.557,33.271 38.557,24.632 40.989,22.2 v1(41.91,22.2)
COM1: LCD1.2 U9.7 | length 37
  Top Layer w0.254: v1(41.046,23.292) 41.264,23.074 U9.7@43.748,23.074
  Bottom Layer w0.254: LCD1.2@17.877,38.094 19.395,36.576 20.623,36.576 22.401,34.798 37.691,34.798 39.014,33.475 39.014,29.269 38.989,29.244 38.989,27.178 ; 39.014,27.178 39.014,25.197 40.919,23.292 v1(41.046,23.292)
COM2: LCD1.3 U9.8 | length 34.7
  Top Layer w0.254: v1(40.996,24.435) 41.074,24.435 41.935,23.574 U9.8@43.748,23.574
  Bottom Layer w0.254: LCD1.3@19.877,38.094 19.877,37.933 22.58,35.23 37.87,35.23 39.446,33.654 39.446,25.629 40.64,24.435 v1(40.996,24.435)
COM3: LCD1.4 U9.9 | length 32.7
  Top Layer w0.254: v1(42.113,24.613) 42.113,24.607 42.647,24.074 U9.9@43.748,24.074
  Bottom Layer w0.254: LCD1.4@21.877,38.094 21.877,36.543 22.758,35.662 38.049,35.662 39.878,33.833 39.878,26.816 42.081,24.613 v1(42.113,24.613)
DW_CHEAK: C24.1 DW.1 P3.2 U9.2 | length 52
  Top Layer w0.254: v1(40.767,20.599) 40.793,20.574 U9.2@43.748,20.574 ; v1@59.039,0.949 v1(59.039,0.991) P3.2@59.039,2.261 ; v1@64.186,8.052 64.211,8.052 64.77,8.611 DW.1@64.77,9.474 ; v1(65.049,13.462) 65.062,13.45 C24.1@65.062,11.481 DW.1@65.062,9.766
  Bottom Layer w0.254: v1(40.767,20.599) 42.266,20.599 43.891,18.974 63.011,18.974 65.145,16.84 65.176,16.84 65.913,16.104 65.913,14.129 65.246,13.462 v1(65.049,13.462) ; v1(59.039,0.991) 59.242,0.787 63.602,0.787 64.206,1.392 v1(64.206,8.082)
FLASH_CLK: U9.37 U10.6 | length 16.3
  Top Layer w0.254: U10.6@22.391,30.927 22.391,33.172 23.076,33.858 33.528,33.858 33.898,33.488 U9.37@33.898,31.424
FLASH_CS: U9.44 U10.1 | length 14.8
  Top Layer w0.254: U10.1@19.851,24.727 19.851,28.112 20.745,29.007 28.525,29.007 29.458,28.074 U9.44@30.548,28.074
FLASH_CTL: R49.1 U9.46 | length 20.2
  Top Layer w0.254: R49.1@16.231,32.283 16.942,32.283 17.247,31.979 v1(17.247,31.598) ; v1(27.991,27.737) 28.372,27.737 29.035,27.074 U9.46@30.548,27.074
  Bottom Layer w0.254: v1(17.247,31.598) 17.247,27.508 18.339,26.416 25.013,26.416 26.333,27.737 v1(27.991,27.737)
FLASH_MISO: U9.38 U10.2 | length 20.3
  Top Layer w0.254: v1(20.904,28.016) 21.121,27.8 U10.2@21.121,24.727 ; v1@33.398,29.803 U9.38@33.398,31.424
  Bottom Layer w0.254: v1(20.904,28.016) 20.904,27.229 21.285,26.848 24.834,26.848 26.535,28.55 32.893,28.55 33.363,29.02 v1(33.363,29.972)
FLASH_MOSI: U9.39 U10.5 | length 13.2
  Top Layer w0.203: U10.5@23.661,30.927 23.661,33.084 24.028,33.452 32.283,33.452 32.898,32.837 U9.39@32.898,31.424
FLASH_WP: U9.45 U10.3 | length 11.8
  Top Layer w0.254: U10.3@22.391,24.727 22.391,27.553 23.412,28.575 28.346,28.575 29.348,27.574 U9.45@30.548,27.574